# EAGLE board MotorShieldTestbench (EAGLE 8.2.1)
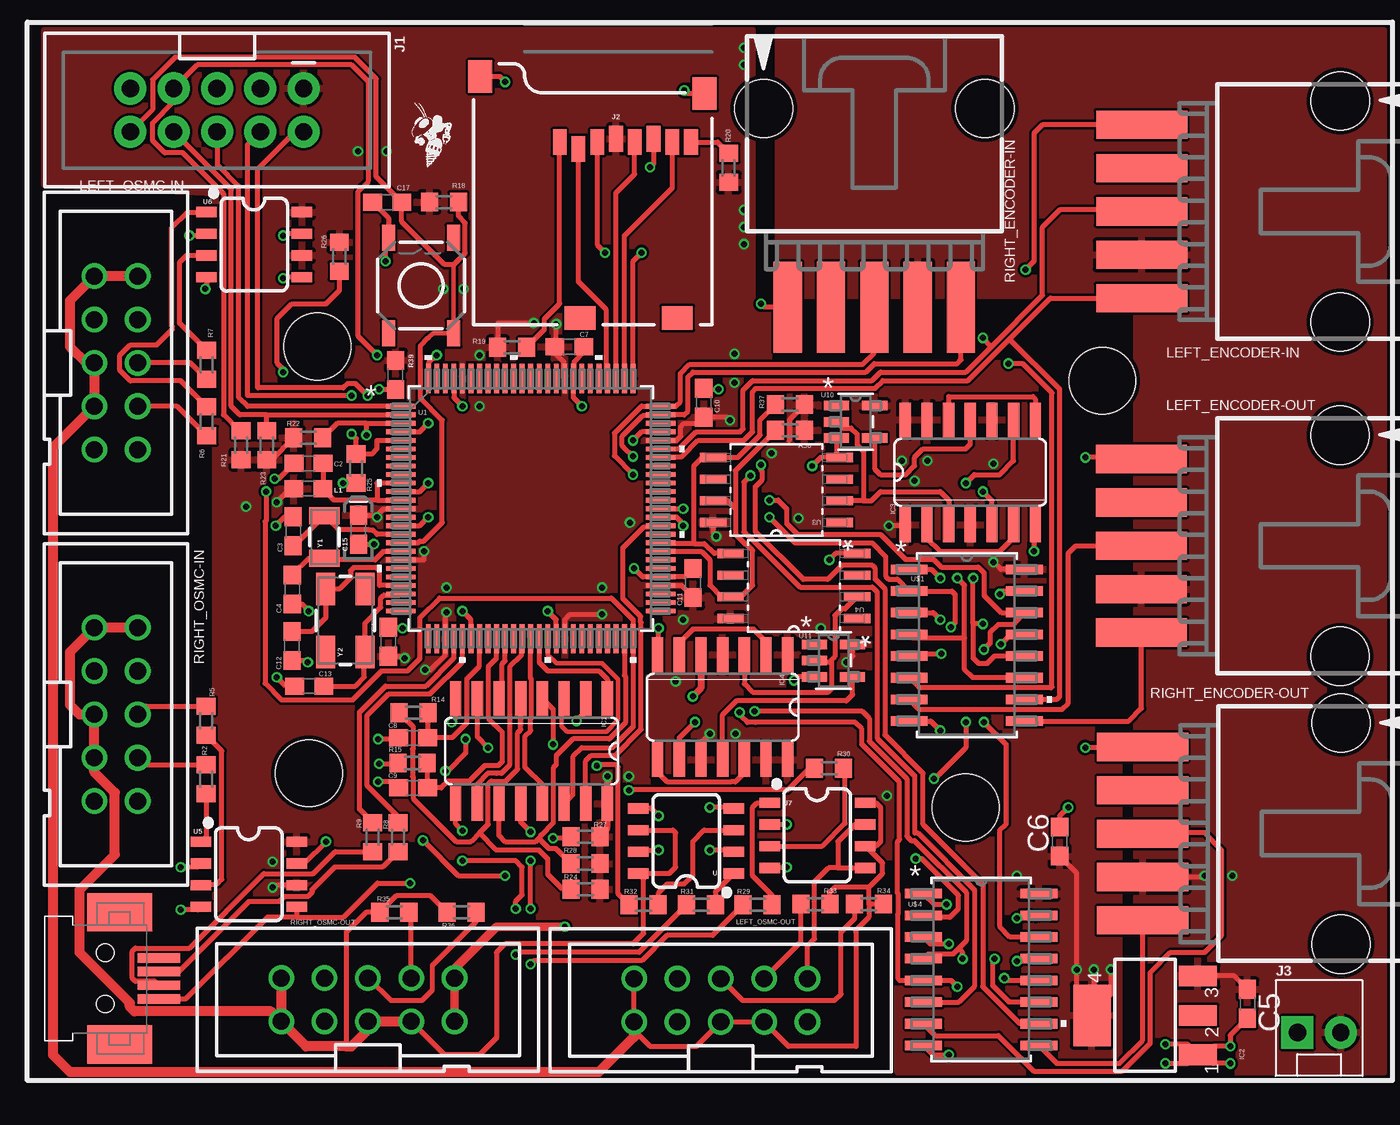
[diagram p0: board, top side]
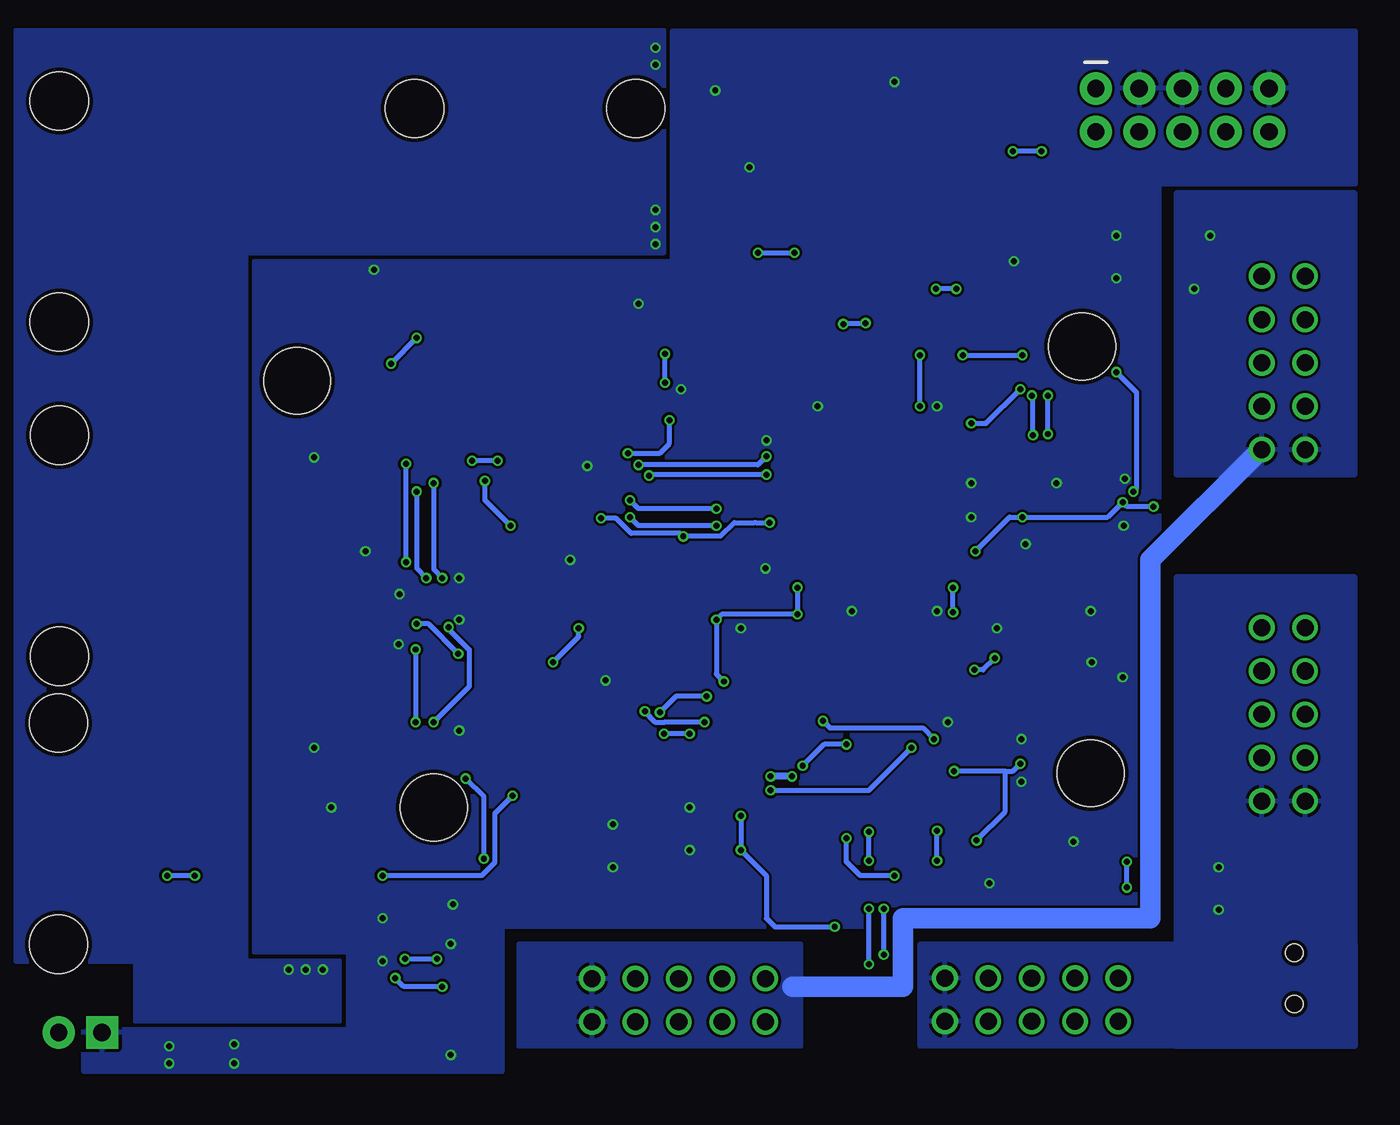
[diagram p1: board, bottom side, seen from below]

No outline drawn. Coordinates in mm, seen from the top.
Copper layers (1*16): Top 0.018mm / dielectric 1.55mm / Bottom 0.018mm
Design rules "eC_2Layer_PClass6_BaseCopperO18_eCDefault *": minimum track width 0.15mm, minimum drill 0.35mm, track to track 0.15mm, track to pad 0.15mm, pad to pad 0.15mm, via to via 0.15mm, smd to smd 0mil, copper to edge 0.25mm, drill to drill 0.35mm, minimum pad ring 0.175mm, minimum via ring 0.125mm, stop-mask expansion 0mil, vias tented up to drill 0.45mm, thermal gap 0.2mm

## Footprints (pad centres in the part's own frame; a part is rotated, then mirrored left to right if it is on the bottom)
STANDOFF-HOLE = hole 3.9: 0,0
C0603 = smd 1.1 x 1: 1 -0.85,0; 2 0.85,0
0603-POLAR = smd 1.1 x 1: + 0.85,0; - -0.85,0
SO16 = smd 0.66 x 2.032: 1 -4.445,-3.073; 2 -3.175,-3.073; 3 -1.905,-3.073; 4 -0.635,-3.073; 5 0.635,-3.073; 6 1.905,-3.073; 7 3.175,-3.073; 8 4.445,-3.073; 9 4.445,3.073; 10 3.175,3.073; 11 1.905,3.073; 12 0.635,3.073; 13 -0.635,3.073; 14 -1.905,3.073; 15 -3.175,3.073; 16 -4.445,3.073
SOT223 = smd 1.219 x 2.235: 1 -2.311,-3.099; 2 0,-3.099; 3 2.311,-3.099 | smd 3.6 x 2.2: 4 0,3.099
SO14 = smd 0.66 x 2.032: 1 -3.81,-3.073; 2 -2.54,-3.073; 3 -1.27,-3.073; 4 0,-3.073; 5 1.27,-3.073; 6 2.54,-3.073; 7 3.81,-3.073; 8 3.81,3.073; 9 2.54,3.073; 10 1.27,3.073; 11 0,3.073; 12 -1.27,3.073; 13 -2.54,3.073; 14 -3.81,3.073
2X5-SHROUDED = drill 1.016 pad 1.88: 1 -1.27,5.08; 2 1.27,5.08; 3 -1.27,2.54; 4 1.27,2.54; 5 -1.27,0; 6 1.27,0; 7 -1.27,-2.54; 8 1.27,-2.54; 9 -1.27,-5.08; 10 1.27,-5.08
MICRO-SD-SOCKET = smd 1.8 x 1.4: CD1 -2.05,0.4; CD2 -7.75,0.4 | smd 0.8 x 1.5: CS -7.84,10.3; DI -6.74,10.7; DO -2.34,10.7; GND -3.44,10.9; RSV1 -8.94,10.7; RSV2 -1.24,10.7; SCLK -4.54,10.7; VCC -5.64,10.9 | smd 1.4 x 1.9: GND1 -13.6,14.55; GND3 -0.45,13.55
MOLEX-1X2 = drill 1.016 pad 1.88 square: 1 0,0 | drill 1.016 pad 1.88: 2 2.54,0
0603 = smd 1.1 x 1: 1 -0.85,0; 2 0.85,0
15-91-05 = smd 1.651 x 5.334: 1 -5.08,-10.795; 2 -2.54,-10.795; 3 0,-10.795; 4 2.54,-10.795; 5 5.08,-10.795 | hole 3.404: -6.477,0.838; 6.477,0.838
PAK100/2500-10 = drill 1 pad 1.422: 1 -5.08,-1.27; 2 -5.08,1.27; 3 -2.54,-1.27; 4 -2.54,1.27; 5 0,-1.27; 6 0,1.27; 7 2.54,-1.27; 8 2.54,1.27; 9 5.08,-1.27; 10 5.08,1.27
R0603 = smd 1 x 1.1: 1 -0.85,0; 2 0.85,0
TACTILE_SWITCH_SMD_5.2MM = smd 1.524 x 0.762: 1 -2.794,1.905; 2 2.794,1.905; 3 -2.794,-1.905; 4 2.794,-1.905
SOT407-1 = smd 1.727 x 0.279: 1 -7.62,6; 2 -7.62,5.5; 3 -7.62,5; 4 -7.62,4.5; 5 -7.62,4; 6 -7.62,3.5; 7 -7.62,3; 8 -7.62,2.5; 9 -7.62,2; 10 -7.62,1.5; 11 -7.62,1; 12 -7.62,0.5; 13 -7.62,0; 14 -7.62,-0.5; 15 -7.62,-1; 16 -7.62,-1.5; 17 -7.62,-2; 18 -7.62,-2.5; 19 -7.62,-3; 20 -7.62,-3.5; 21 -7.62,-4; 22 -7.62,-4.5; 23 -7.62,-5; 24 -7.62,-5.5; 25 -7.62,-6; 51 7.62,-6; 52 7.62,-5.5; 53 7.62,-5; 54 7.62,-4.5; 55 7.62,-4; 56 7.62,-3.5; 57 7.62,-3; 58 7.62,-2.5; 59 7.62,-2; 60 7.62,-1.5; 61 7.62,-1; 62 7.62,-0.5; 63 7.62,0; 64 7.62,0.5; 65 7.62,1; 66 7.62,1.5; 67 7.62,2; 68 7.62,2.5; 69 7.62,3; 70 7.62,3.5; 71 7.62,4; 72 7.62,4.5; 73 7.62,5; 74 7.62,5.5; 75 7.62,6 | smd 0.279 x 1.727: 26 -6,-7.62; 27 -5.5,-7.62; 28 -5,-7.62; 29 -4.5,-7.62; 30 -4,-7.62; 31 -3.5,-7.62; 32 -3,-7.62; 33 -2.5,-7.62; 34 -2,-7.62; 35 -1.5,-7.62; 36 -1,-7.62; 37 -0.5,-7.62; 38 0,-7.62; 39 0.5,-7.62; 40 1,-7.62; 41 1.5,-7.62; 42 2,-7.62; 43 2.5,-7.62; 44 3,-7.62; 45 3.5,-7.62; 46 4,-7.62; 47 4.5,-7.62; 48 5,-7.62; 49 5.5,-7.62; 50 6,-7.62; 76 6,7.62; 77 5.5,7.62; 78 5,7.62; 79 4.5,7.62; 80 4,7.62; 81 3.5,7.62; 82 3,7.62; 83 2.5,7.62; 84 2,7.62; 85 1.5,7.62; 86 1,7.62; 87 0.5,7.62; 88 0,7.62; 89 -0.5,7.62; 90 -1,7.62; 91 -1.5,7.62; 92 -2,7.62; 93 -2.5,7.62; 94 -3,7.62; 95 -3.5,7.62; 96 -4,7.62; 97 -4.5,7.62; 98 -5,7.62; 99 -5.5,7.62; 100 -6,7.62
SOIC127P798X216-8N = smd 1.549 x 0.533: 1 -3.708,1.905; 2 -3.708,0.635; 3 -3.708,-0.635; 4 -3.708,-1.905; 5 3.708,-1.905; 6 3.708,-0.635; 7 3.708,0.635; 8 3.708,1.905
SO08 = smd 0.6 x 1.2: 1 -1.905,-2.8; 2 -0.635,-2.8; 3 0.635,-2.8; 4 1.905,-2.8; 5 1.905,2.8; 6 0.635,2.8; 7 -0.635,2.8; 8 -1.905,2.8
DBV5 = smd 1.473 x 0.559: 1 -1.118,0.95; 2 -1.118,0; 3 -1.118,-0.95; 4 1.118,-0.95; 5 1.118,0.95
NS16 = smd 2.159 x 0.559: 1 -3.378,4.445; 2 -3.378,3.175; 3 -3.378,1.905; 4 -3.378,0.635; 5 -3.378,-0.635; 6 -3.378,-1.905; 7 -3.378,-3.175; 8 -3.378,-4.445; 9 3.378,-4.445; 10 3.378,-3.175; 11 3.378,-1.905; 12 3.378,-0.635; 13 3.378,0.635; 14 3.378,1.905; 15 3.378,3.175; 16 3.378,4.445
32005-101 = smd 2.5 x 0.55: 1 3.15,1.2; 2 3.15,0.4; 3 3.15,-0.4; 4 3.15,-1.2 | smd 3.8 x 2.25: M1 0.85,3.875; M2 0.85,-3.875 | hole 1: 0,1.5; 0,-1.5
CRYSTAL-SMD-3.2X1.5MM = smd 1 x 1.8: P$1 -1.25,0; P$2 1.25,0
CRYSTAL-SMD-5X3.2-4PAD = smd 1.9 x 1.1: 1 -1.85,-1.15; 2 1.85,-1.15; 3 1.85,1.15; 4 -1.85,1.15

## Placement (x,y rotation side)
22,1  [STANDOFF-HOLE]  17,43 0 top
22,2  [STANDOFF-HOLE]  16.5,18 0 top
22,3  [STANDOFF-HOLE]  55,16 0 top
22,4  [STANDOFF-HOLE]  63,41 0 top
C1  0.1uF  [C0603]  21.16,25.7 90 top
C2  1.0uF  [C0603]  16.48,36.16 180 top
C3  22pF  [C0603]  15.59,32.17 270 top
C4  22pF  [C0603]  15.54,28.77 90 top
C5  4.7uF  [C0603]  71.5,4.5 270 top
C6  4.7uF  [C0603]  60.5,14 90 top
C7  0.1uF  [C0603]  31.76,42.98 0 top
C8  10uF  [C0603]  22.61,20.08 180 top
C9  10uF  [C0603]  22.61,17.14 180 top
C10  0.1uF  [C0603]  39.65,39.7 90 top
C11  0.1uF  [C0603]  39.02,29.14 90 top
C12  22pF  [C0603]  15.52,25.46 90 top
C13  22pF  [C0603]  16.52,23.11 0 top
C15  10uF  [0603-POLAR]  19.41,32.26 90 top
C17  0.1uF  [C0603]  21.09,51.46 180 top
IC1  74LS157D  [SO16]  29.55,19.3 180 top
IC2  317EMP  [SOT223]  65.5,3.81 90 top
IC3  74AC74D  [SO14]  55.26,35.63 0 top
IC4  74AC74D  [SO14]  40.75,21.87 180 top
J1  JTAG Connector  [2X5-SHROUDED]  11.12,56.85 270 top
J2  MICRO-SD_CARD_SOCKET  [MICRO-SD-SOCKET]  40.14,44.27 0 top
J3  Power In  [MOLEX-1X2]  74.44,2.81 0 top
L1  10uH  [0603]  16.47,34.67 0 top
LEFT_ENCODER-IN  C-GRID-05-15-91  [15-91-05]  76.1,50.91 270 top
LEFT_ENCODER-OUT  C-GRID-05-15-91  [15-91-05]  76.09,31.32 270 top
LEFT_OSMC-IN  2510-  [PAK100/2500-10]  5.2,42.04 270 top
LEFT_OSMC-OUT  2510-  [PAK100/2500-10]  40.64,4.7 0 top
R2  1k  [R0603]  10.48,17.65 270 top
R5  1k  [R0603]  10.48,21.08 270 top
R6  1k  [R0603]  10.52,38.61 90 top
R7  1k  [R0603]  10.52,41.92 90 top
R8  33  [R0603]  21.73,14.26 270 top
R9  33  [R0603]  20.23,14.26 270 top
R14  47k  [R0603]  22.64,21.54 0 top
R15  47k  [R0603]  22.58,18.6 0 top
R18  10k  [R0603]  24.41,51.46 180 top
R19  47k  [R0603]  28.41,42.96 180 top
R20  47k  [R0603]  41.1,53.47 270 top
R21  10k  [R0603]  12.54,37.22 270 top
R22  10k  [R0603]  16.47,37.65 180 top
R23  10k  [R0603]  14.04,37.22 270 top
R24  10k  [R0603]  32.71,11.21 180 top
R25  10k  [R0603]  19.27,35.85 90 top
R26  10k  [R0603]  18.29,48.27 270 top
R27  10k  [R0603]  32.7,14.27 180 top
R28  10k  [R0603]  32.7,12.71 180 top
R29  1k  [R0603]  42.8,10.29 0 top
R30  1k  [R0603]  46.99,18.29 0 top
R31  1k  [R0603]  39.49,10.29 0 top
R32  1k  [R0603]  36.12,10.29 0 top
R33  10k  [R0603]  46.19,10.34 180 top
R34  10k  [R0603]  49.31,10.34 180 top
R35  10k  [R0603]  21.51,9.85 0 top
R36  10k  [R0603]  25.45,9.85 0 top
R37  4.7k  [R0603]  44.7,39.6 0 top
R38  4.7k  [R0603]  44.7,38.1 0 top
R39  10k  [0603]  21.59,41.33 90 top
RIGHT_ENCODER-IN  C-GRID-05-15-91  [15-91-05]  49.64,56.1 0 top
RIGHT_ENCODER-OUT  C-GRID-05-15-91  [15-91-05]  76.16,14.46 270 top
RIGHT_OSMC-IN  2510-  [PAK100/2500-10]  5.2,21.45 270 top
RIGHT_OSMC-OUT  2510-  [PAK100/2500-10]  19.96,4.73 0 top
S1  [TACTILE_SWITCH_SMD_5.2MM]  23.08,46.57 90 top
U1  LPC1768FBD100  [SOT407-1]  29.5,33.5 0 top
U3  ATTINY85-20SU  [SOIC127P798X216-8N]  43.9,34.59 180 top
U4  ATTINY85-20SU  [SOIC127P798X216-8N]  44.92,28.97 180 top
U5  DUAL-OPTOISOLATOR_SOIC8  [SO08]  12.99,12.08 270 top
U6  DUAL-OPTOISOLATOR_SOIC8  [SO08]  13.3,48.97 270 top
U7  DUAL-OPTOISOLATOR_SOIC8  [SO08]  46.3,14.36 270 top
U8  DUAL-OPTOISOLATOR_SOIC8  [SO08]  38.6,14.03 90 top
U10  SN74LVC1G04DBVR  [DBV5]  48.54,38.59 0 top
U11  SN74LVC1G04DBVR  [DBV5]  47.25,24.6 0 top
U$1  SN74HC153NSR  [NS16]  55.06,25.5 0 top
U$4  SN74HC153NSR  [NS16]  55.9,6.5 0 top
U$16  [ROBOBUZZ_0.2X]  23.44,53.5 0 top
X6  MINI-USB_4P-32005-101  [32005-101]  4.56,5.98 0 top
Y1  32.768kHz  [CRYSTAL-SMD-3.2X1.5MM]  17.41,31.84 90 top
Y2  12MHz  [CRYSTAL-SMD-5X3.2-4PAD]  18.64,26.95 90 top

## Library data of the parts
22,1-22,4 = temp
C1-C13 C17 R2 R5-R9 R14 R15 R18-R38 = rcl
C15 = SparkFun-Capacitors; PROD_ID: CAP-13210
IC1 IC3 IC4 = 74xx-eu
IC2 = linear
J1 = SparkFun-Connectors; PROD_ID: CONN-08671; SF_ID: PRT-08506
J2 = SparkFun-Connectors; PROD_ID: CONN-07820; SF_ID: PRT-00127
J3 = SparkFun-Connectors; SF_ID: PRT-09918
L1 = SparkFun-Coils; PROD_ID: NDUC-07874
LEFT_ENCODER-IN LEFT_ENCODER-OUT RIGHT_ENCODER-IN RIGHT_ENCODER-OUT = con-molex; OC_FARNELL: unknown; OC_NEWARK: unknown
LEFT_OSMC-IN LEFT_OSMC-OUT RIGHT_OSMC-IN RIGHT_OSMC-OUT = con-3m; MF: 3M; MPN: 2510-6002UB; OC_FARNELL: 9838244; OC_NEWARK: 46F4725
R39 = SparkFun-Resistors; PROD_ID: RES-00824
S1 = SparkFun-Switches; PROD_ID: SWCH-08247; SF_SKU: COM-08720
U1 = DigiKey; MANUFACTURER_PART_NUMBER: lpc1768fbd100; VENDOR: NXP
U3 U4 = Atmel_By_element14_Batch_1-00; MPN: ATTINY85-20SU; OC_FARNELL: 1455164; OC_NEWARK: 58M3797; PACKAGE: SOIC-8; SUPPLIER: Atmel
U5-U8 = SparkFun-DiscreteSemi; PROD_ID: IC-09076
U10 U11 = zilog; MANUFACTURER_PART_NUMBER: SN74LVC1G04DBVR; VENDOR: Texas Instruments
U$1 U$4 = DigiKey; MANUFACTURER_PART_NUMBER: SN74HC153NSR; VENDOR: Vendor
U$16 = RoboJackets-Aesthetics
X6 = con-cypressindustries; OC_FARNELL: unknown; OC_NEWARK: unknown
Y1 = SparkFun-Clocks; PROD_ID: XTAL-13062
Y2 = SparkFun-Clocks; PROD_ID: XTAL-08297

## Nets
+3V3: C1.1 C6.1 C7.1 C10.1 C11.1 C15.+ IC1.16 IC2.4 IC3.1 IC3.4 IC3.10 IC3.13 IC3.14 IC4.1 IC4.4 IC4.10 IC4.13 IC4.14 J1.1 J2.VCC L1.1 R18.2 R19.2 R20.2 R21.2 R22.2 R23.2 R24.1 R26.1 R27.1 R28.1 R37.2 R38.2 R39.2 U1.13 U1.19 U1.28 U1.42 U1.54 U1.71 U1.84 U1.96 U3.8 U4.8 U5.6 U5.8 U6.6 U6.8 U10.5 U11.5 U$1.16 U$4.16
+3V3A: C2.1 L1.2 U1.10 U1.12
+5V: C5.1 IC2.3 J3.2 LEFT_ENCODER-IN.4 LEFT_ENCODER-OUT.4 RIGHT_ENCODER-IN.4 RIGHT_ENCODER-OUT.4
DM: R8.1 U1.30
DP: R9.1 U1.29
GND: C1.2 C2.2 C3.1 C4.1 C5.2 C6.2 C7.2 C8.2 C9.2 C10.2 C11.2 C12.1 C13.1 C15.- C17.2 IC1.8 IC2.1 IC3.7 IC4.7 J1.3 J1.5 J1.9 J2.GND J2.GND1 J2.GND3 J3.1 LEFT_ENCODER-IN.1 LEFT_ENCODER-OUT.1 R25.1 RIGHT_ENCODER-IN.1 RIGHT_ENCODER-OUT.1 S1.2 U1.11 U1.15 U1.31 U1.41 U1.55 U1.72 U1.83 U1.97 U3.4 U4.4 U5.5 U5.7 U6.5 U6.7 U7.2 U7.4 U8.2 U8.4 U10.3 U11.3 U$1.1 U$1.3 U$1.8 U$1.13 U$1.15 U$4.1 U$4.3 U$4.8 U$4.13 U$4.15 X6.4
L+12V: LEFT_OSMC-IN.1 LEFT_OSMC-IN.2 LEFT_OSMC-IN.5 LEFT_OSMC-IN.7 LEFT_OSMC-OUT.1 LEFT_OSMC-OUT.2 LEFT_OSMC-OUT.5 LEFT_OSMC-OUT.7 R33.1 R34.1 U7.6 U7.8
LDIR: IC1.12 R29.1
LDIR1: LEFT_OSMC-OUT.8 R33.2
LDIRIN: LEFT_OSMC-IN.8 R6.1
LDIRIN3: IC1.14 R26.2 U1.50
LDIRO: IC1.13 U1.38
LE1: LEFT_ENCODER-OUT.3 U$1.7
LE2: LEFT_ENCODER-OUT.5 U$1.9
LEIN1: LEFT_ENCODER-IN.3 U1.70 U$1.6
LEIN2: LEFT_ENCODER-IN.5 U1.69 U$1.10
LGND: LEFT_OSMC-IN.9 LEFT_OSMC-IN.10 LEFT_OSMC-OUT.9 LEFT_OSMC-OUT.10 U6.2 U6.4 U7.5 U7.7
LSPEED: C8.1 R14.2 U1.32
LSPEEDH: IC1.7 R30.1
LSPEEDH1: LEFT_OSMC-OUT.6 R34.2
LSPEEDIN: LEFT_OSMC-IN.6 R7.1
LSPEEDIN3: IC1.5 R14.1 R24.2
LSPEEDO: IC1.6 U1.35
LWAVE: IC3.3 U3.2 U10.2
LWAVE1: IC3.5 U$1.5 U$1.12
LWAVE2: IC3.9 U$1.4 U$1.11
LWAVE*: IC3.11 U10.4
N$1: IC3.2 IC3.6
N$4: IC3.8 IC3.12
N$5: IC4.2 IC4.6
N$6: IC4.8 IC4.12
N$8: J2.RSV1 R19.1
N$11: J2.RSV2 R20.1
N$12: R7.2 U6.3
N$13: R9.2 X6.3
N$14: R5.2 U5.3
N$15: C4.2 U1.18 Y1.P$1
N$16: C3.2 U1.16 Y1.P$2
N$17: C13.2 U1.23 Y2.1
N$18: C12.2 U1.22 Y2.3
N$19: R2.2 U5.1
N$20: R8.2 X6.2
N$21: R6.2 U6.1
N$23: R29.2 U7.1
N$25: R30.2 U7.3
N$26: R39.1 U1.4
N$36: R31.2 U8.1
N$37: R32.2 U8.3
OSMC: IC1.1 U1.39
R+12V: R35.1 R36.1 RIGHT_OSMC-IN.1 RIGHT_OSMC-IN.2 RIGHT_OSMC-IN.5 RIGHT_OSMC-IN.7 RIGHT_OSMC-OUT.1 RIGHT_OSMC-OUT.2 RIGHT_OSMC-OUT.5 RIGHT_OSMC-OUT.7 U8.6 U8.8
RDIR: IC1.9 R31.1
RDIR1: R35.2 RIGHT_OSMC-OUT.8
RDIRIN: R2.1 RIGHT_OSMC-IN.8
RDIRIN3: IC1.11 R28.2 U1.49
RDIRO: IC1.10 U1.37
RE1: RIGHT_ENCODER-OUT.3 U$4.7
RE2: RIGHT_ENCODER-OUT.5 U$4.9
REIN1: RIGHT_ENCODER-IN.3 U1.75 U$4.6
REIN2: RIGHT_ENCODER-IN.5 U1.74 U$4.10
RGND: RIGHT_OSMC-IN.9 RIGHT_OSMC-IN.10 RIGHT_OSMC-OUT.9 RIGHT_OSMC-OUT.10 U5.2 U5.4 U8.5 U8.7
RSPEED: C9.1 R15.2 U1.34
RSPEEDH: IC1.4 R32.1
RSPEEDH1: R36.2 RIGHT_OSMC-OUT.6
RSPEEDIN: R5.1 RIGHT_OSMC-IN.6
RSPEEDIN3: IC1.2 R15.1 R27.2
RSPEEDO: IC1.3 U1.40
RST: C17.1 J1.10 R18.1 S1.3 U1.17
RTCK: J1.7 R21.1 U1.100
RWAVE: IC4.3 U4.2 U11.2
RWAVE1: IC4.5 U$4.5 U$4.12
RWAVE2: IC4.9 U$4.4 U$4.11
RWAVE*: IC4.11 U11.4
SCL: R38.1 U1.58 U3.7 U4.7
SD_CS: J2.CS U1.79
SD_DI: J2.DI U1.76
SD_DO: J2.DO U1.77
SD_SCK: J2.SCLK U1.78
SDA: R37.1 U1.59 U3.5 U4.5
SELECT1: U1.62 U$1.2 U$4.2
SELECT2: U1.63 U$1.14 U$4.14
STOP: IC1.15 U1.61
TCK: J1.4 R25.2 U1.5
TDI: J1.8 R23.1 U1.2
TDO: J1.6 U1.1
TMS: J1.2 R22.1 U1.3

## Tracks (layer width: path | path; a pad name or v marks a point on that pad's centre or on a via)
+3V3  (via drill 0.35)
  Top 0.3: C15.+ 20.49,33.11 20.87,33.49 U1.13 | U1.71 38.05,37.5 38.28,37.74 38.28,38.28 38.5,38.5 39.29,38.5 C10.1 41.02,38.85 v41.19,38.69 | U1.54 38.31,29 C11.1 | U1.84 31.44,41.18 31.44,42.11 30.91,42.64 C7.1 31,43.07 v31,44.31 | R37.2 44.66,38.7 44.66,37.5 | IC3.1 51.4,32.5 v50.5,32.5 | R23.2 14.34,36.37 R22.2 | U1.42 31.5,27 31.81,27.31 v33.69,27.31 | U1.19 23.25,30.5 v23.25,31 | v24.56,27.44 24.5,27.38 U1.28 24.5,24.95 23.61,24.06 v23.31,24.06 | C1.1 22.02,24.85 v22.12,24.75 | v29.69,44.38 27.56,44.38 R19.2 | v48,24.5 48.37,24.86 U11.5 | U5.6 14.51,11.45 v14.38,11.31 | v14.62,33.88 15.42,34.67 L1.1 | 61.5,5 v61.5,6.5 61.5,12.15 C6.1 | v62.5,6.5 62.5,5 | v63.5,6.5 63.5,5 | IC4.10 39.48,19.79 v40,20.31 | U3.8 40.19,32.06 v40.38,31.88 | U$1.16 57.05,29.95 v56.62,30.38 | IC1.16 33.99,14.71 R27.1
  Top 0.406: 20.49,33.11 20.5,33.11 v20.5,33 | IC1.16 v33.99,17.81 v34,17.81
  Bottom 0.3: v41.44,40.88 v41.44,42.56 | v51.25,36.31 v52.75,36.31 | 36.12,32.69 v35.31,32.69 | v50.5,32.5 52,34 v52,35.12 | v24.38,46.38 v25.56,46.38 | v56.62,30.38 v56.62,36.12 | v19.38,54.44 v21.06,54.44 | v38,23.38 38.44,23.81 v38.44,27 38.12,27.31 v33.69,27.31 v33.69,28.88 | v43.62,36.75 41.75,36.75 41.19,37.31 v41.19,38.69 | v45.19,32.94 44.31,32.94 43.43,32.05 40.55,32.05 v40.38,31.88 40.35,31.9 38.19,31.9 37.4,32.69 36.19,32.69 | v40,20.31 v41.5,20.31 | v24.56,27.44 v24.56,28.88 | v26.5,39.5 v26.5,42.5 | v31,44.31 30.94,44.38 v29.69,44.38 | v48,24.5 46.5,26 v46.5,26.5 | v14.38,11.31 v14.38,12.81 | v12.81,33.62 14.38,33.62 v14.62,33.88 15.5,33 v20.5,33 21.25,33 v23.25,31 | v50.38,16.69 51.42,15.64 51.42,12.76 52.19,12 v58,12 | v22.12,24.75 22.81,24.06 v23.31,24.06
  Bottom 0.406: v34,17.81 v35.25,17.81
  other vias: 42,60.5 42,59.5 42,51 42,50 42,49
  pour Top: 1,61.5 1,52.5 11,52 11,8.5 30.5,9 51,9 51,0.5 64,0.5 64,45 42.5,45 42.5,61.5
  pour Bottom: 60.5,3.5 60.5,7 66,7 66,48.5 41.5,48.5 41.5,61.5 79.5,61.5 79.5,7 72.5,7 72.5,3.5
+3V3A
  Top 0.3: 20.5,34 U1.12 | 20.5,34 17.99,34 L1.2 17.34,34.68 C2.1 | U1.10 20.5,35 20.5,34
+5V  (via drill 0.35)
  Top 0.3: RIGHT_ENCODER-OUT.4 68.92,11.92 v69,12 | C5.1 70.73,6.12 IC2.3
  Bottom 0.3: v69,12 v70.62,12
  pour Top: 65,0.5 79.5,0.5 79.5,61.5 44,61.5 44,46 65,46
DM
  Top 0.3: R8.1 21.73,15.46 19.93,17.26 19.93,21.4 21.18,22.65 23.61,22.65 25.5,24.54 U1.30
DP
  Top 0.3: R9.1 20.23,15.14 19.48,15.89 19.48,21.59 20.99,23.1 23.36,23.1 24.94,24.68 25,24.74 U1.29
GND  (via drill 0.35)
  Top 0.25: S1.2 21,49.19 v21,48
  Top 0.3: U1.11 23,34.5 v23.5,35 | U1.15 23,32.5 v23.5,33 | U1.31 26,27 v25.5,27.5 | U1.41 31,27 v30.5,27.5 | U1.72 36,38 v35.5,37.5 | v32.5,39.5 32,40 U1.83 32.06,41.18 32.06,42.11 32.61,42.66 C7.2 | U1.97 25,40 v25.5,39.5 | J2.GND 36.7,53.7 v36.5,53.5 | J2.GND3 38.68,57.82 v38.5,58 | J2.GND1 27.68,58.82 v28,58.5 | C12.1 16.33,24.61 v16.44,24.5 | C4.1 16.08,27.92 v16.5,27.5 | C15.- 20.22,31.41 | 20.22,31.41 20.31,31.5 | 20.22,31.41 20.3,31.41 v20.31,31.43 | U4.4 47.38,30.88 v47,30.5 | C11.2 38.52,29.5 U1.55 36.06,29.5 v35.56,30 | v46,36 46.5,36.5 U3.4 47.42,36.68 U10.3 | U$1.3 53.09,27.41 v53.5,27 | U$1.13 57.63,26.14 v57.06,25.56 | U$1.15 57.17,28.68 v57,28.5 | U$1.8 52.95,21.05 v53.5,20.5 | U$4.3 52.93,8 v54,8 | U$4.15 59.1,9.5 v58,9.5 | U$4.13 59.14,7 v58,7 | U$4.8 53.08,1.5 v54,1.5 | U7.2 v44.5,15 | U7.4 43.55,12.5 v44.5,12.5 | C9.2 21.41,17.5 v20.56,17.5 | C8.2 21.68,20 v20.56,20 | R25.1 v18.5,35 | C17.2 21.17,50.53 S1.2 | C10.2 39.7,40.5 v40.5,40.5 | IC4.7 37,25 v37,26.5 | IC3.7 59,32.48 v59,31 | X6.4 9.28,4.78 14.07,9.57 15.79,9.57 | 15.79,9.57 18.53,9.57 20.52,11.56 v22.44,11.56 | IC2.1 67.97,2.12 v66.69,2.12 | v66.69,1 68,1 | 69.5,2 v70.5,2 70.5,2.65 C5.2 | v70.5,1 69.5,1 | v14.5,35.25 14.72,35.25 C2.2 | RIGHT_ENCODER-OUT.1 65.32,19.5 v62,19.5 | LEFT_ENCODER-OUT.1 65.2,36.5 v62,36.5 | LEFT_ENCODER-IN.1 59.49,55.99 59,55.5 59,48 v58.5,47.5 | RIGHT_ENCODER-IN.1 43.2,45.3 v43,45.5 | v24.88,21 25.11,21.23 IC1.8 | U11.3 45.15,23.65 v44.94,23.44 | U$4.1 53.15,10.31 v53.88,10.31 | C13.1 15.14,23.11 v14.62,23.62 | C3.1 15.08,33.02 v14.56,32.5 | U$1.1 52.99,29.95 v53.5,29.44 | U8.4 41.34,16 v40,16 | U8.2 41.3,13.5 v40,13.5 | C1.2 21.95,26.55 v22,26.5
  Top 0.3: C6.2 60.5,15.5 v61,16 | U5.5 15.79,9.57 | U5.7 16.21,12.71 v17.5,14 | U6.5 15.06,47.06 v15,47 | U6.7 15.11,49.6 v15,49.5
  pour Bottom: 1,52.5 12.5,52.5 12.5,9 51,9 51,0.5 75.5,0.5 75.5,3 60,3 60,7.5 65.5,7.5 65.5,48 41,48 41,61.5 1,61.5
L+12V
  Top 0.3: U7.8 49.73,16.27 50,16 50,14 49.73,13.72 U7.6 49.15,13.72 50,12.88 50.12,12.75 50.12,12.12 49.31,11.31 | LEFT_OSMC-OUT.2 LEFT_OSMC-OUT.1 35.56,2.94 36.5,2 39.21,2 LEFT_OSMC-OUT.5 LEFT_OSMC-OUT.7 44.61,2 48.56,2 48.56,8.5 48.56,8.65 48.56,8.81 49.31,9.56 49.31,10.34 | 49.31,10.34 49.31,11.31 | R34.1 49.31,10.34 | 49.31,11.31 47.31,11.31 47,11 47,10.38 R33.1
  Top 0.6: LEFT_OSMC-IN.2 LEFT_OSMC-IN.1 2.5,45.69 2.5,43 3.46,42.04 LEFT_OSMC-IN.5 LEFT_OSMC-IN.7 1.5,37.07 1.5,1.5 2.5,0.5 33.5,0.5 35.56,2.56 LEFT_OSMC-OUT.1
LDIR  (via drill 0.35)
  Top 0.3: R29.1 40.16,8.5 37.5,8.5 36.02,7.02 29.71,7.02 v29.5,6.81 | v29.5,10.06 v29.5,12.88 | v29.5,14.56 28.91,15.15 IC1.12
  Bottom 0.3: v29.5,6.81 v29.5,10.06 | v29.5,12.88 v29.5,14.56
LDIR1
  Top 0.3: LEFT_OSMC-OUT.8 45.34,8.13 R33.2
LDIRIN
  Top 0.3: R6.1 8.78,39.5 LEFT_OSMC-IN.8
LDIRIN3  (via drill 0.35)
  Top 0.3: v15,41.5 15,41.68 14.65,42.03 14.65,44.65 15.5,45.5 17.5,45.5 18.29,46.29 R26.2 | v14,34.5 14,32.81 13.93,32.74 13.93,23.26 14.88,22.3 19.07,22.3 20.76,24 22.28,24 23.01,24.73 23.01,27.12 24.15,28.26 34.24,28.26 35.5,27 U1.50 35.52,25.86 35.52,20.75 34.27,19.5 32.5,19.5 31.95,18.95 31.95,16.73 IC1.14
  Bottom 0.3: v15,41.5 13.8,40.3 13.8,34.7 v14,34.5
LDIRO
  Top 0.3: IC1.13 30.18,17.32 29.18,18.32 29.18,20.18 29.5,20.5 29.5,21.19 29.55,21.23 29.55,23.51 29.5,23.56 U1.38
LE1
  Top 0.3: U$1.7 52.26,21.75 60.64,21.75 61,22.1 61,30.88 61.45,31.32 LEFT_ENCODER-OUT.3
LE2
  Top 0.3: U$1.9 64.56,21.05 65.3,21.8 LEFT_ENCODER-OUT.5
LEIN1  (via drill 0.35)
  Top 0.3: U1.70 38.18,37 39.19,38.01 41.77,38.01 41.95,38.18 41.95,40.45 42.5,41 49.5,41 50,41.5 55,41.5 56.5,43 | U$1.6 52.28,23 60,23 60.05,23.05 60.05,40.29 58.34,42 v57.5,42 | 56.5,43 59.5,46 59.5,50 60.5,51 65.22,51 LEFT_ENCODER-IN.3 | 56.5,43 v56,43.5
  Bottom 0.3: v56,43.5 v57.5,42
LEIN2
  Top 0.3: U1.69 37.17,36.55 38.37,36.55 39.32,37.5 42,37.5 42.5,38 42.5,40.36 42.69,40.55 49.69,40.55 50.14,41 55.14,41 57.57,43.43 | LEFT_ENCODER-IN.5 59.97,45.83 57.57,43.43 | U$1.10 60.33,22.32 60.5,22.5 60.5,40.5 57.57,43.43
LGND  (via drill 0.35)
  Top 0.3: U6.2 10.39,49.5 v9.5,49.5 | 10.44,47 U6.4 10.5,46.44 v10.44,46.38 | LEFT_OSMC-OUT.10 45.72,7.87 46.14,8.29 46.14,11.64 46.95,12.46 47.5,12.46 | 47.5,12.46 U7.5 | U7.7 48.49,14.99 47.5,14 47.5,12.46
  Bottom 1.2: LEFT_OSMC-IN.10 6.54,36.96 13,30.5 13,9.5 27.5,9.5 27.5,5.5 33.97,5.5
  pour Bottom: 1,52 11.5,52 11.5,35.5 1,35.5
  pour Bottom: 33.5,8 33.5,2 50,2 50,8
LSPEED
  Top 0.3: U1.32 26.5,24.27 25.75,23.51 25.75,20.93 24.9,20.08 C8.1 23.49,20.11 R14.2
LSPEEDH  (via drill 0.35)
  Top 0.3: R30.1 45.82,18.29 44.56,17.03 35.28,17.03 v35.25,17 | v27,19.5 26.38,20.12 IC1.7
  Bottom 0.3: v35.25,17 29.5,17 v27,19.5
LSPEEDH1
  Top 0.3: LEFT_OSMC-OUT.6 41.92,4.69 47.31,4.69 47.69,5.06 47.69,8.69 48.5,9.5 48.5,10.3 R34.2
LSPEEDIN
  Top 0.3: R7.1 9.55,42.04 LEFT_OSMC-IN.6
LSPEEDIN3
  Top 0.152: R24.2 31.38,11.21
  Top 0.3: R14.1 22.61,20.71 22.61,19.46 22.58,19.42 22.58,17.8 22.61,17.77 22.61,16.52 25.13,14 26,14 26.5,14.5 | 28.91,20.82 IC1.5 28.91,20.55 28.73,20.37 28.73,18.23 28.04,17.54 27.19,17.54 27.02,17.37 27,17.37 27,15.01 26.5,14.5 | 31.38,11.21 30.5,12.09 30.5,13 30,13.5 27.5,13.5 26.5,14.5
LSPEEDO
  Top 0.3: IC1.6 27.82,22.55 27.82,24.41 28,24.59 U1.35
LWAVE
  Top 0.3: 49,33.96 U3.2 | 49,33.96 49.46,33.96 50,34.5 53.5,34.5 54,34 IC3.3 | U10.2 47.79,38.22 48.28,38.22 48.62,37.88 48.62,37.24 49,36.86 49,33.96
LWAVE1  (via drill 0.35)
  Top 0.3: IC3.5 56.53,33.97 v56,34.5 | U$1.12 56.68,24.86 56.24,24.43 55.76,24.43 55.42,24.76 55.42,26.75 | 55.42,26.75 55.42,29.43 v55.44,29.44 | U$1.5 51.82,25 v53.56,25 | v56,26.75 55.42,26.75
  Bottom 0.3: v56,34.5 56,30 v55.44,29.44 | v53.56,25 55.31,26.75 v56,26.75
LWAVE2  (via drill 0.35)
  Top 0.3: 57.5,23.5 57.59,23.59 U$1.11 55.41,23.59 54.93,24.07 54.93,25.93 | 51.82,25.99 U$1.4 51.89,25.93 54.93,25.93 | v55,35 55.5,35.5 57,35.5 57.8,36.3 IC3.9 | 54.91,29.02 v54.5,29.44 54.93,29.01 54.93,25.93
  Bottom 0.3: v55,35 55,29.94 v54.5,29.44
LWAVE*
  Top 0.3: U10.4 49.66,35.84 50,35.5 51.5,35.5 52,36 52,36.5 52.5,37 55,37 55.26,37.26 IC3.11
N$1
  Top 0.3: IC3.2 52.72,31.78 53.5,31 57,31 57.8,31.8 IC3.6
N$4
  Top 0.3: IC3.12 54,40.06 58.94,40.06 59.07,39.93 IC3.8
N$5
  Top 0.3: IC4.2 43.29,25.71 42.56,26.44 39,26.44 38.21,25.65 IC4.6
N$6
  Top 0.3: IC4.12 42.02,18.02 41.5,17.5 41.22,17.5 41.2,17.48 37.52,17.48 37,18 37,18.74 IC4.8
N$8
  Top 0.3: R19.1 30.3,44 30.3,44.61 31.2,45.51 J2.RSV1
N$11
  Top 0.3: J2.RSV2 40.45,54.97 R20.1
N$12
  Top 0.3: R7.2 8.93,44.37 8.93,47.92 9.34,48.34 U6.3
N$13
  Top 0.3: X6.3 7.49,5.8 6.34,5.8 6.16,5.98 6.16,7.58 6.34,7.75 9.5,7.75 13.86,12.12 16.75,12.12 18.04,13.41 R9.2
N$14
  Top 0.3: 10.48,19.97 R5.2 11.4,19.3 11.4,11.78 11.12,11.5 10.24,11.5 U5.3
N$15
  Top 0.3: U1.18 20.87,30.99 20.38,30.51 17.49,30.51 Y1.P$1 16.5,30.59 C4.2
N$16
  Top 0.3: U1.16 20.5,32 20.25,32.25 20.04,32.25 20.03,32.26 18.24,32.26 Y1.P$2 | Y1.P$2 17.91,33.09 | C3.2 15.64,31.32 Y1.P$2
N$17
  Top 0.3: U1.23 21.82,28.44 20.89,28.44 20.72,28.26 20.72,27.71 19.79,26.79 Y2.1 19.75,25.06 19.75,23.62 19.23,23.11 C13.2
N$18
  Top 0.3: U1.22 20.64,29 20.64,29.87 20.46,30.05 19.12,30.05 18.94,29.87 18.94,29.44 18.3,28.8 Y2.3 17.5,27.12 16.68,26.31 C12.2
N$19
  Top 0.3: R2.2 10.48,14.28 U5.1
N$20
  Top 0.3: X6.2 8.88,6.38 13,10.5 14.79,10.5 15.06,10.78 16.44,10.78 16.69,11.02 16.69,11.19 18,12.5 20.82,12.5 R8.2
N$21
  Top 0.3: R6.2 8.99,40.99 6.04,40.99 5.42,41.6 5.42,42.48 6.04,43.09 7.59,43.09 8.5,44 8.5,44.16 8.47,44.18 8.47,49.98 9.38,50.88 U6.1
N$23
  Top 0.3: R29.2 43.65,10.85 42.5,12 42.5,16 42.77,16.27 U7.1
N$25
  Top 0.3: U7.3 46.59,13.72 47.93,15.07 47.93,18.2 R30.2
N$26  (via drill 0.35)
  Top 0.3: U1.4 23,38 v23.5,38.5 | v20.62,40.5 21.57,40.5 R39.1
  Bottom 0.3: v23.5,38.5 22.62,38.5 v20.62,40.5
N$36
  Top 0.3: R31.2 40.34,11.04 40.34,11.06 U8.1
N$37
  Top 0.3: U8.3 39.67,14.67 39,14 39,12 38.5,11.5 37.5,11.5 36.97,10.97 R32.2
OSMC
  Top 0.3: U1.39 30,24.5 30.5,24 33.5,24 34,23.5 IC1.1
R+12V
  Top 0.3: RIGHT_OSMC-OUT.7 24.46,1.5 26.5,1.5 27.5,2.5 27.5,7.5 28,8 35.5,8 36.12,8.62 36.12,11.81 U8.8 37.63,12.13 38,12.5 38,14.5 37.83,14.67 U8.6 | R36.1 23.64,10.81 21.62,10.81 R35.1 19.85,9.85 18.69,8.69 18.69,2
  Top 0.6: RIGHT_OSMC-IN.2 RIGHT_OSMC-IN.1 2.5,25.1 2.5,22 3.05,21.45 RIGHT_OSMC-IN.5 RIGHT_OSMC-IN.7 3.93,18.07 5.13,16.87 5.13,13.24 3.06,11.17 3.06,7.5 6.01,4.54 6.01,4.32 6.27,4.05 14.29,4.05 RIGHT_OSMC-OUT.1 | RIGHT_OSMC-OUT.2 RIGHT_OSMC-OUT.1 | RIGHT_OSMC-OUT.1 16.34,2 18.69,2 19,2 19.96,2.96 RIGHT_OSMC-OUT.5 RIGHT_OSMC-OUT.7
RDIR  (via drill 0.35)
  Top 0.3: R31.1 35.85,7.5 28.75,7.5 v28.62,7.38 | v25.5,14.62 25.11,15.02 IC1.9 | v28.62,10.06 28.62,10.5 29,10.88 29,12.5 28.64,12.86 25.51,12.86 v25.5,12.88
  Bottom 0.3: v28.62,7.38 v28.62,10.06 | v25.5,12.88 v25.5,14.62
RDIR1
  Top 0.3: RIGHT_OSMC-OUT.8 22.5,9.71 R35.2
RDIRIN
  Top 0.3: RIGHT_OSMC-IN.8 6.88,18.5 R2.1
RDIRIN3
  Top 0.3: U1.49 35,23.74 35.05,23.69 35.05,20.95 34.11,20.01 31.99,20.01 31,19.03 31,18.5 30.82,18.32 30.82,15.09 30.1,14.37 30.1,14.31 29.89,14.11 | 27.64,15.36 IC1.11 27.64,14.36 28.04,13.96 29.75,13.96 29.89,14.11 | R28.2 30.98,13.59 30.56,13.59 30.04,14.11 29.89,14.11
RDIRO
  Top 0.3: U1.37 28.94,25.82 28.94,24.89 28.27,24.23 28.27,21.5 | 28.27,21.5 28.27,21.23 | 28.27,21.5 28.29,21.49 28.29,20.81 | IC1.10 26.38,17.38 26.98,17.99 27.49,17.99 27.5,18 27.79,18 28.29,18.5 28.29,20.81 | 28.29,20.81
RE1
  Top 0.3: U$4.7 53.21,2.63 56.92,2.63 59,0.55 64.19,0.55 65.81,2.18 65.81,6.31 67,7.5 69,7.5 70,8.5 70,13.5 69,14.5 65.4,14.5 RIGHT_ENCODER-OUT.3
RE2
  Top 0.3: U$4.9 60.33,1 64,1 65.36,2.36 RIGHT_ENCODER-OUT.5
REIN1  (via drill 0.35)
  Top 0.3: RIGHT_ENCODER-IN.3 49.64,42.64 48.95,41.95 38.81,41.95 38.27,41.41 38.27,39.77 38,39.5 U1.75 36.01,39.5 36,39.51 34.41,37.92 34.41,36.59 v35.5,35.5 | v42.38,35.44 42,35.06 42,32.14 42.24,31.89 42.3,31.89 45.29,28.9 49.53,28.9 49.8,28.63 49.8,20.06 52,17.86 52,14.5 52.19,14.5 55.5,11.19 55.5,5.5 54.59,4.59 U$4.6
  Bottom 0.3: v35.5,35.5 42.31,35.5 v42.38,35.44
REIN2  (via drill 0.35)
  Top 0.3: RIGHT_ENCODER-IN.5 54.72,42.22 54.5,42 49.64,42 49.14,41.5 39,41.5 38.72,41.22 38.72,39.22 38.5,39 U1.74 37.06,38.94 36.06,38.94 34.86,37.74 34.86,37.2 34.93,37.14 v35.5,36.56 | 43,35.81 v43,36.06 43,35.75 43.08,35.68 43.08,35.2 42.66,34.79 42.66,32.16 45.47,29.35 46.91,29.35 47.73,30.17 49.53,30.17 49.7,30 49.7,29.36 50.25,28.81 50.25,20.25 52.5,18 52.5,15 56,11.5 56,5.5 58.17,3.33 U$4.10
  Bottom 0.3: v35.5,36.56 36,36.06 v43,36.06
RGND  (via drill 0.35)
  Top 0.3: U5.2 9.97,12.5 v9,12.5 | U5.4 10.01,10 v9,10 | U8.7 35.91,13.5 v37,13.5 | v37,15.5 36.56,15.94 U8.5
  Top 0.5: RIGHT_OSMC-OUT.9 RIGHT_OSMC-OUT.10 25.04,6.54 27.5,9 v31.5,9
  Bottom 0.3: v37,15.5 v37,13.5 35.5,12 35.5,9.5 35,9 v31.5,9
  pour Bottom: 1,29.5 11.5,29.5 11.5,2 1,2
  pour Bottom: 1,8 1,2 26.5,2 26.5,8
RSPEED
  Top 0.3: U1.34 27.5,24.73 27.02,24.24 27.02,21.23 27.82,20.42 27.82,18.68 27.6,18.45 26.8,18.45 25.93,17.57 25.93,17.54 24.65,17.54 24.25,17.14 C9.1 23.43,17.18 R15.2 23.58,18.45
RSPEEDH  (via drill 0.35)
  Top 0.3: R32.1 34.62,10.94 34.62,18.38 34.5,18.5 33.44,18.5 v33.38,18.44 | IC1.4 30.81,21.75 v30.81,19.69
  Bottom 0.3: v30.81,19.69 32.12,19.69 v33.38,18.44
RSPEEDH1
  Top 0.3: RIGHT_OSMC-OUT.6 20,6 21.31,4.69 23.12,4.69 23.75,5.31 23.75,6.75 26.3,9.3 R36.2
RSPEEDIN
  Top 0.3: RIGHT_OSMC-IN.6 6.95,21.93 R5.1
RSPEEDIN3  (via drill 0.35)
  Top 0.3: v20.62,18.56 21.69,18.56 R15.1 | v25.69,20 25.69,19.19 24.62,18.12 v24.5,18.12 | v23.19,14.06 25.25,12 v28,12 | IC1.2 32.73,21.6 v32.19,21.06 | R27.2 31.77,14.19 v30.81,14.19
  Bottom 0.3: v25.69,20 26.34,20.66 31.78,20.66 v32.19,21.06 | v28,12 30,12 30.81,12.81 v30.81,14.19 | 20.5,18.56 v20.62,18.56 21.06,18.12 21.5,18.12 | 21.5,18.12 v24.5,18.12 | v23.19,14.06 21.5,15.75 21.5,18.12
RSPEEDO
  Top 0.25: U1.40 30.5,24.95 31,24.45 33.69,24.45 34.62,23.51 34.62,21.12 33.94,20.44 31.62,20.44 31.31,20.75 31.31,20.81 31.31,22.23
  Top 0.3: 31.5,22.33 IC1.3 31.31,22.23
RST
  Top 0.25: S1.3 25.02,43.74 25.02,43.5 | 23.5,43.5 23.78,43.78 S1.3 | 24.98,47.8 S1.3
  Top 0.3: 23.5,43.5 23.04,43.04 23.04,39.96 24.31,38.69 24.31,32.69 23.23,31.6 23,31.6 22.9,31.5 U1.17 | J1.10 7.34,56.88 7.34,58.63 8.66,59.95 19.19,59.95 20.45,58.69 20.45,52.95 C17.1 21.95,50.32 24.47,47.8 24.98,47.8 25.66,48.48 25.66,50.25 25.27,50.65 R18.1
RTCK  (via drill 0.35)
  Top 0.3: U1.100 23.56,41.18 23.56,42.11 23.74,42.28 23.78,42.28 v24,42.5 | v20.5,42.5 19.39,43.6 19.39,52.08 20,52.69 20,58.5 19,59.5 9.96,59.5 J1.7 8.58,57.33 7.34,56.09 7.34,55.06 8.06,54.34 9.12,54.34 11.5,51.96 11.5,39 12.43,38.07 R21.1
  Bottom 0.3: v24,42.5 v20.5,42.5
RWAVE
  Top 0.3: U4.2 47.92,27.63 47.73,27.63 47.33,27.23 47.33,24.83 47.17,24.67 | 47.17,24.67 47,24.5 46.23,24.5 U11.2 | IC4.3 42.02,23.23 42.5,22.75 46.92,22.75 47.17,22.99 47.17,24.67
RWAVE1  (via drill 0.35)
  Top 0.3: v54.5,5.5 54.13,5.87 U$4.5 51.13,5.87 51,6 51,9.7 51.01,9.71 51.01,10.96 51,10.97 51,14 51.11,14.11 51.1,14.13 51.1,17.49 48.9,19.69 48.9,20.6 48.5,21 42.69,21 42.68,20.99 42.2,20.99 41.86,21.32 41.86,21.45 v41.75,21.56 | v57.25,6 57.38,5.87 U$4.12
  Top 0.406: IC4.5 39.48,22.98 v39,22.5
  Bottom 0.3: v39,22.5 40.81,22.5 v41.75,21.56 | v57.25,6 56.75,5.5 v54.5,5.5
RWAVE2  (via drill 0.35)
  Top 0.3: v42.62,21.62 48.94,21.62 49.35,21.21 49.35,19.88 51.55,17.68 51.55,14.31 51.81,14.05 52,14.05 55.02,11.03 55.02,8.18 54.58,7.73 | U$4.4 52.79,7.4 54.25,7.4 54.58,7.73 | v54.81,7.12 54.81,7.5 54.58,7.73 | U$4.11 57.54,4.59 56.57,5.57 56.57,7.01 v56.69,7.12 | IC4.9 38.21,20.09 v39.12,21
  Bottom 0.3: v39.12,21 41.46,21 41.5,20.96 42,20.96 42.35,21.31 42.35,21.35 v42.62,21.62 | v56.69,7.12 v54.81,7.12
RWAVE*
  Top 0.3: IC4.11 40.75,21.44 41.55,22.24 48,22.24 48.37,22.6 U11.4
SCL
  Top 0.3: U1.58 39.5,31 40,30.5 40,29 40.66,28.34 U4.7 41.84,28.34 42.5,29 42.5,31.05 42.11,31.44 42.06,31.44 41.5,32 41.5,33.5 | 41.5,33.5 41,34 40.23,34 U3.7 | R38.1 43.4,37.65 43.4,37.63 41.5,35.73 41.5,33.5
SD_CS
  Top 0.3: U1.79 33.94,41.18 33.94,45.15 32.3,46.78 J2.CS
SD_DI  (via drill 0.35)
  Top 0.3: U1.76 35.5,48 v36,48.5 | J2.DI 33.4,48.96 v33.86,48.5
  Bottom 0.3: v36,48.5 v33.86,48.5
SD_DO
  Top 0.3: U1.77 35,49.5 37.8,52.3 J2.DO
SD_SCK
  Top 0.3: U1.78 34.5,52 35.6,53.1 J2.SCLK
SDA
  Top 0.3: R37.1 42.95,38.7 42.95,37.81 41.64,36.5 U3.5 39.56,36.5 39.06,36 39.06,31.45 | U1.59 37.17,31.45 39.06,31.45 | U4.5 40.26,30.88 39.69,31.45 39.06,31.45
SELECT1  (via drill 0.35)
  Top 0.3: U1.62 38.05,33 38.44,32.61 v38.44,32.5 | v43.5,33 45,31.5 49.5,31.5 50.3,30.7 50.3,29.54 50.48,29.37 50.99,29.37 U$1.2 54.2,28.68 54.38,28.5 54.38,26.81 v54.12,26.56 | v55,21 55,19.5 53.19,17.69 v53.12,17.69 | v52.06,13 52.42,13 54.58,10.84 54.57,10.83 54.57,10.05 54.07,9.55 52.65,9.55 U$4.2
  Bottom 0.3: v38.44,32.5 43,32.5 v43.5,33 | v55,21 52.92,23.07 52.92,25.24 54.12,26.44 v54.12,26.56 | v52.06,13 52.06,16.62 v53.12,17.69
SELECT2  (via drill 0.35)
  Top 0.3: U1.63 v38.44,33.5 | v43.5,34 44,34 44.5,33.5 44.5,32.64 45.14,32 50,32 51.48,30.52 53.11,30.52 53.56,30.07 55.74,30.07 56.08,29.74 56.08,28.42 57.09,27.41 U$1.14 57.75,26.71 56.9,26.71 56.42,26.24 56.42,25.61 v56.06,25.25 | U$4.14 57.59,8.4 57,9 57,14.68 57.35,15.03 57.35,19.65 57.35,19.71 v56.06,21
  Bottom 0.3: v38.44,33.5 43,33.5 v43.5,34 | v56.06,25.25 v56.06,21
STOP
  Top 0.3: IC1.15 32.73,18.73 33.05,19.05 34.46,19.05 35.98,20.57 35.98,26.83 35.95,26.86 35.95,27.19 34.9,28.23 34.9,31.21 36.13,32.44 37.06,32.44 U1.61
TCK  (via drill 0.35)
  Top 0.3: U1.5 20.5,37.5 20.5,37 20.2,36.7 R25.2 19.27,37.6 v19,37.88 | v19,40.12 12.91,40.12 12.91,54.83 J1.4
  Bottom 0.3: v19,37.88 v19,40.12
TDI
  Top 0.3: 14.04,39 U1.2 | 14.04,39 12.45,39 11.95,39.5 11.95,52.2 J1.8 | R23.1 14.04,39
TDO
  Top 0.3: J1.6 11.15,55.55 11.15,53.65 12.4,52.39 12.4,40 12.9,39.5 U1.1
TMS  (via drill 0.35)
  Top 0.3: 19.88,38.5 U1.3 | 19.88,38.5 18.17,38.5 R22.1 | v19.94,40.12 | v19.94,40.12 19.24,40.83 18.76,40.83 18.51,40.58 13.5,40.58 13.5,53.38 15.7,55.58 J1.2 | v19.88,37.81 19.88,38.5
  Bottom 0.3: v19.88,37.81 19.88,40.06 v19.94,40.12

## Text on the board
Document: RoboJackets